# Altium PCB msp430_EMC_v1.0_fucu.PcbDoc (part 1 of 2)
Units mil, origin at the board's own origin, x right, y up, seen from the top; angles counter-clockwise.
Board outline 6328.11 x 4921.26 mil, 2 copper layers (Top Layer, Bottom Layer); 186 components, 146 nets, 623 pads, 75 vias.
Unrouted connection lines stored in the file: 47.
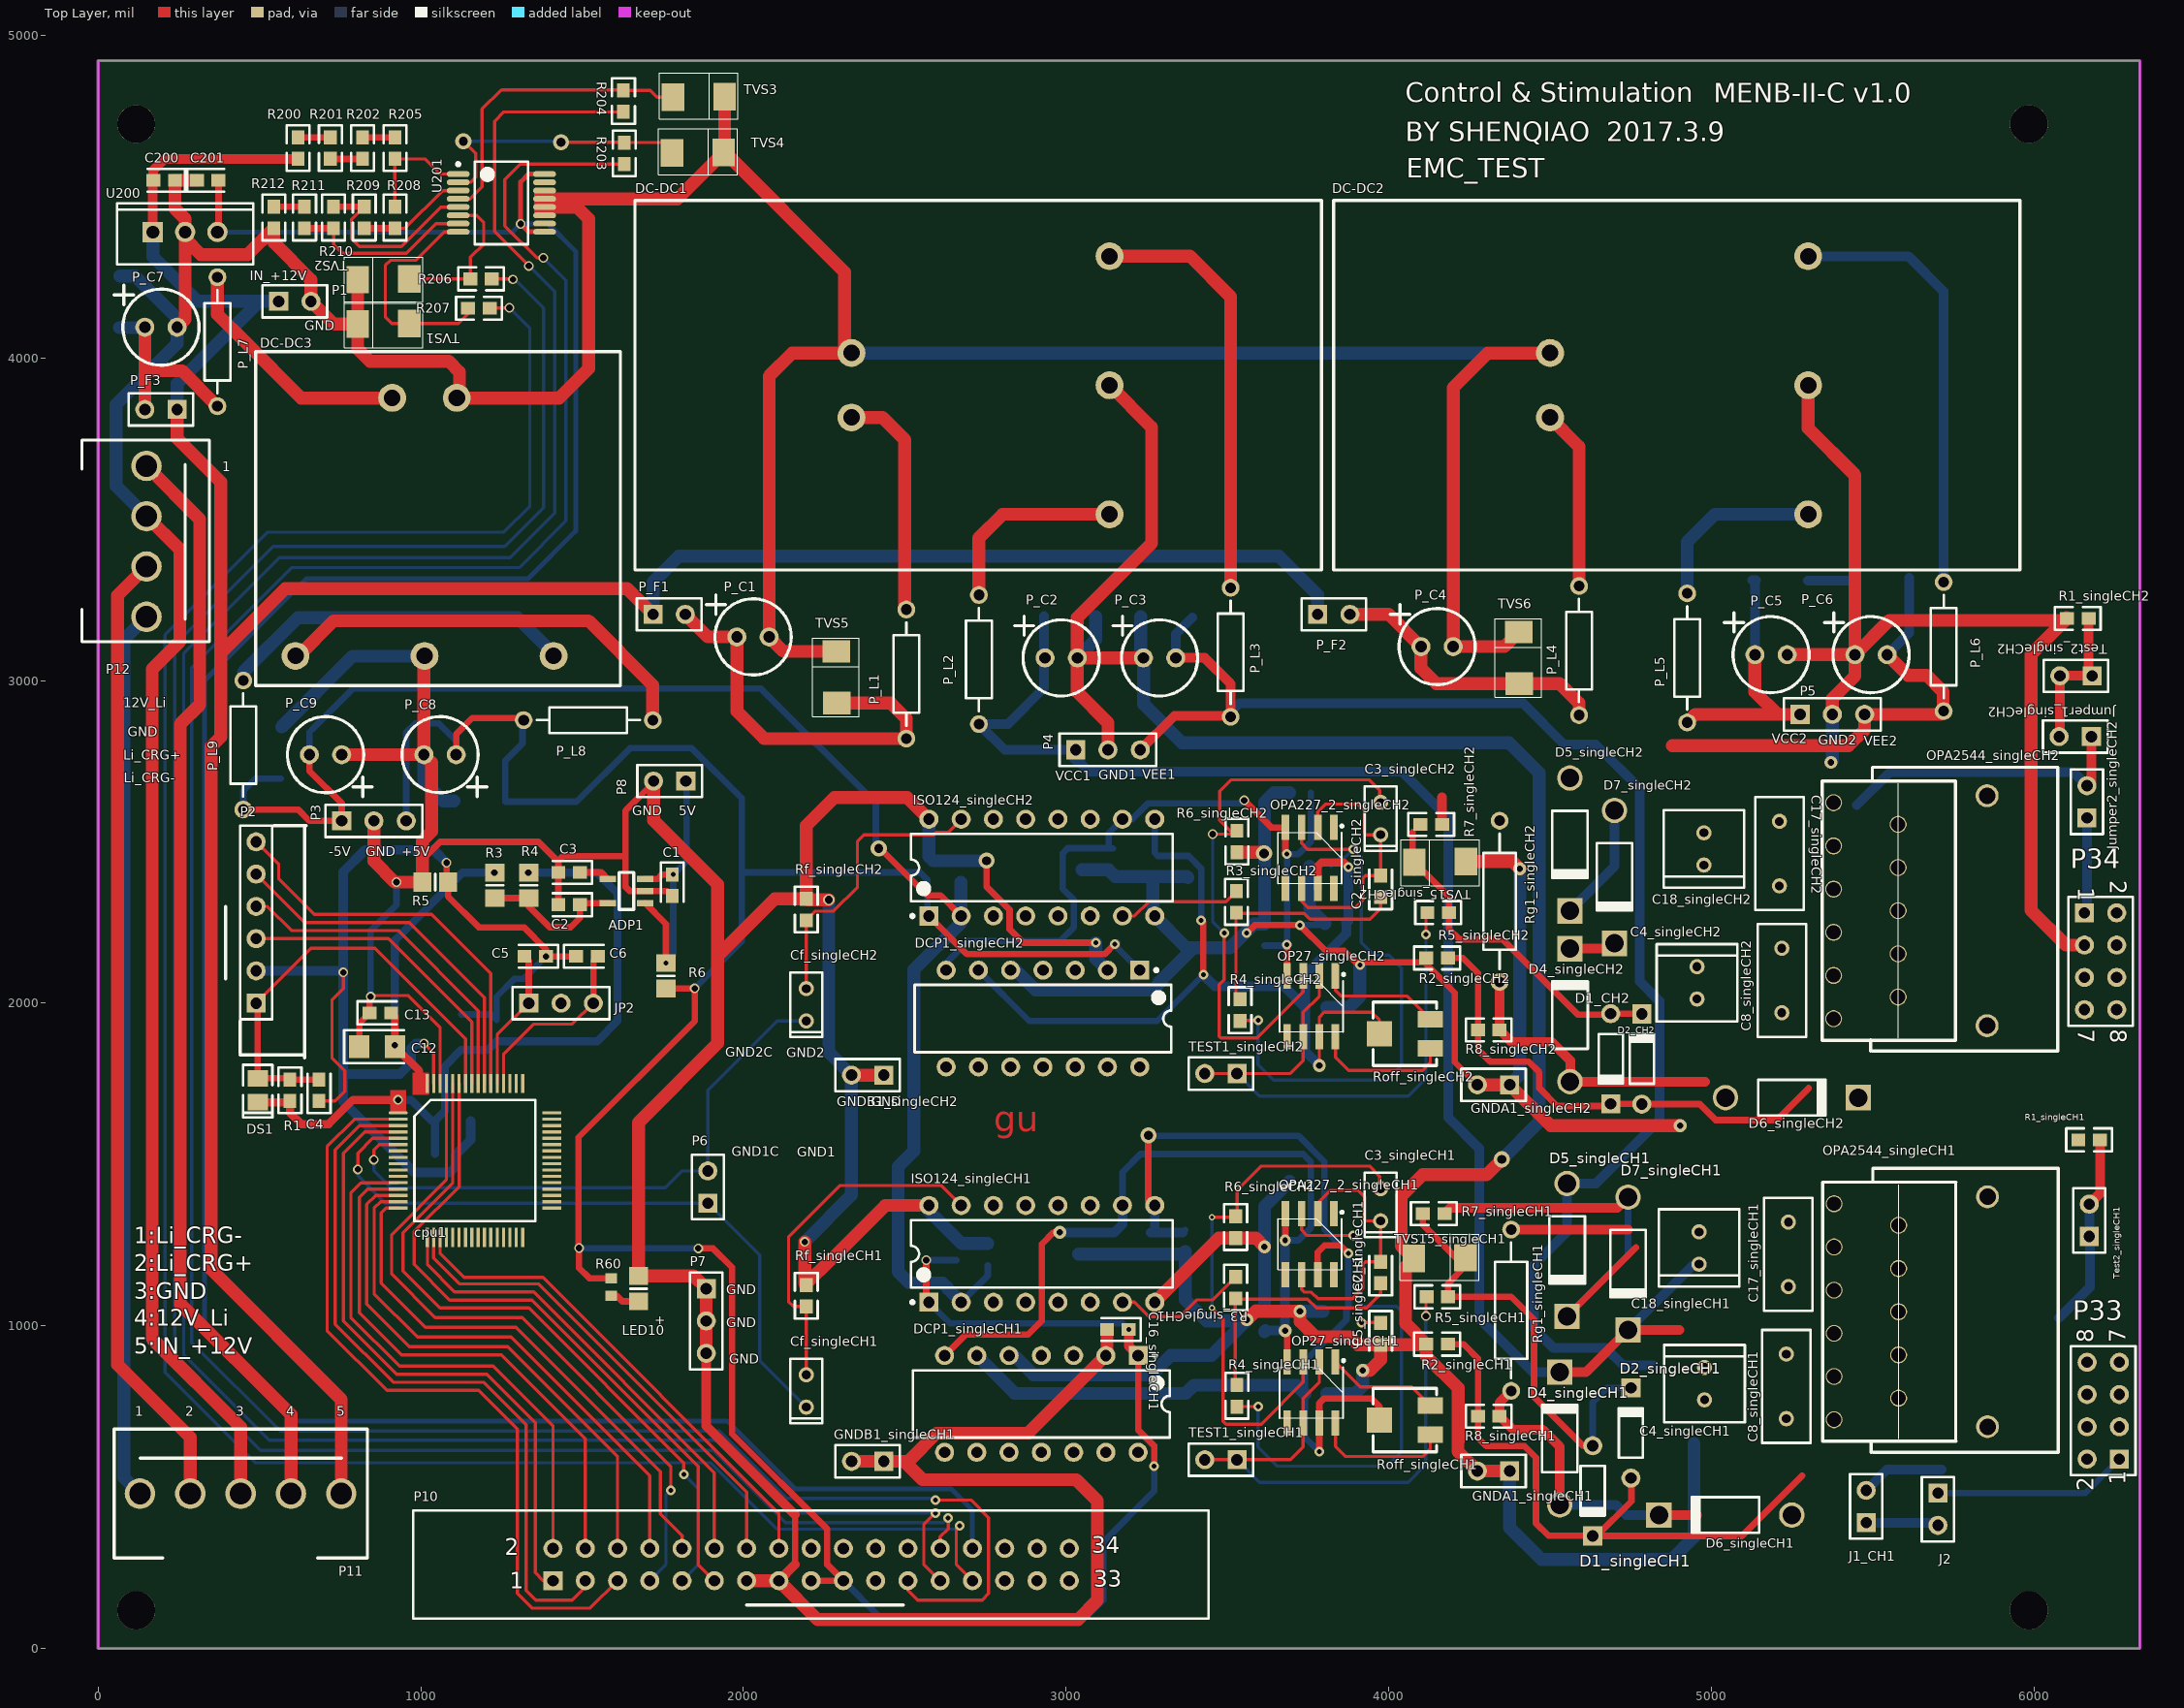
[diagram p0: Top Layer view]
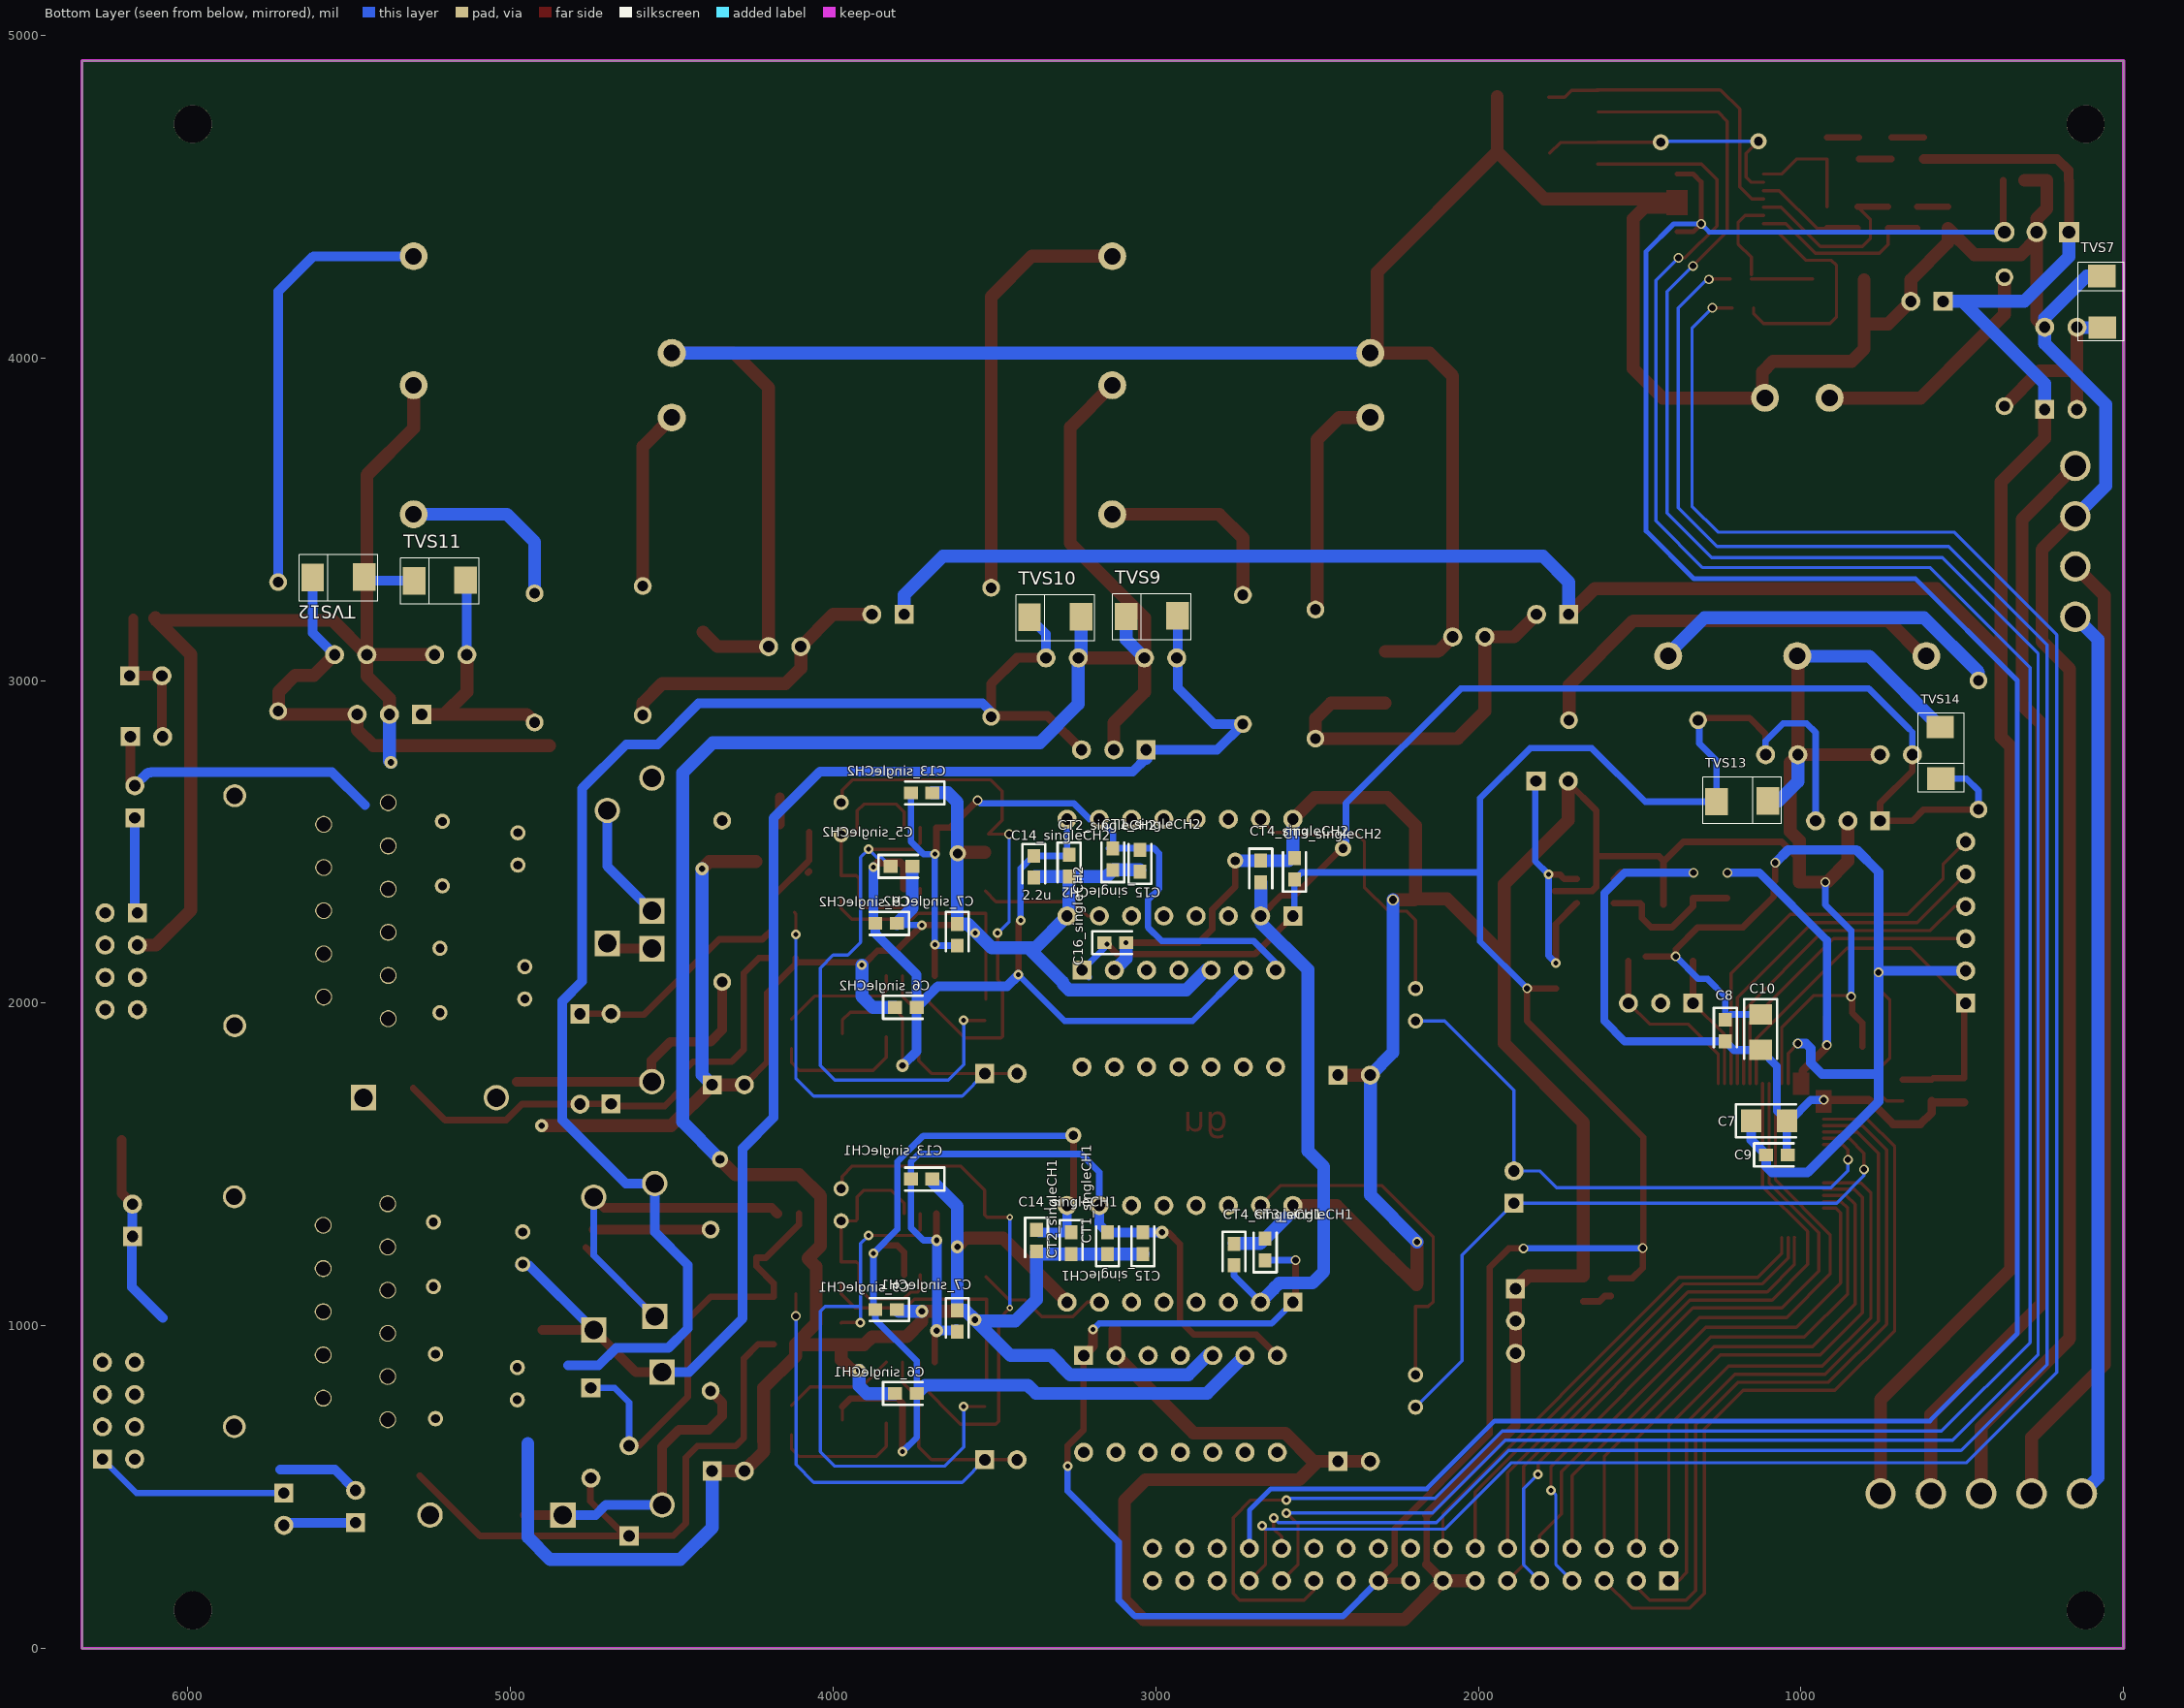
[diagram p1: Bottom Layer view, seen from below]

## Layer stack, top to bottom
Top Layer: signal copper 1.4
Dielectric: dielectric 12.6, FR-4, Dk 4.8
Bottom Layer: signal copper 1.4

## Board outline
0,4921.26 6328.11,4921.26 6328.11,0 0,0 0,4921.26

## Design rules (kind name [scope] priority, off if disabled: settings)
Clearance [All] p1: gap=10
ComponentClearance [All] p1 off: gap=2 collisioncheckmode=3 verticalgap=2 showdistances=FALSE
FabricationTestPointUsage TestPointUsage [All] p1: valid=0 allowmultiple=FALSE
FabricationTestpoint Testpoint [All] p1: side=3 testpointundercomponent=TRUE minsize=40 maxsize=100 preferedsize=60 minholesize=0 maxholesize=40 preferedholesize=32 testpointgrid=1 allowsidetop=TRUE allowsidebottom=TRUE usegrid=TRUE gridtolerance=0.01
HoleSize [All] p1: absolutevalues=TRUE maxlimit=500 minlimit=0 maxpercent=80.000 minpercent=20.000
HoleToHoleClearance [All] p1: gap=1 allowstackedmicrovias=TRUE
MinimumSolderMaskSliver [All] p1: minsoldermaskwidth=0
PolygonConnect [All] p1: connectstyle=Relief reliefconductorwidth=10 reliefentries=4 polygonreliefangle="90 Angle"
RoutingVias [All] p1: holewidth=20 width=30 viastyle="Through Hole" minholewidth=8 minwidth=20 maxholewidth=48 maxwidth=50
SilkToSilkClearance [All] p1: silktosilkclearance=0
SilkscreenOverComponentPads [IsPad] p1: minsilkscreentomaskgap=0
SolderMaskExpansion [All] p1: expansion=4
Width Width_VEE [All] p1: maxlimit=100 minlimit=10 preferedwidth=30
Width Width_VCC [InNetClass('VCC[1..2]')] p2: maxlimit=100 minlimit=20 preferedwidth=30
Width Width_GNDA [InNetClass('GNDA[1..2]')] p3: maxlimit=100 minlimit=10 preferedwidth=30
Width Width_ALL [All] p4: maxlimit=100 minlimit=5 preferedwidth=10 minimp=50.000000 maximp=50.000000 favimp=50.000000
20 further rules are at their usual default settings.

## Classes and differential pairs
net class VEE[1..2]: VEE1 VEE2
net class VCC[1..2]: VCC1 VCC2
net class SIG_IN[1..2]: SIG_IN1 SIG_IN2
net class GNDA[1..2]: GNDA1 GNDA2
component class 输出板: P1 P3 P4 P5 P11 P12 P33 P34
component class U_ADC_USB: ADP1 bead C1 C2 C3 C4 C5 C6 C7 C8 C9 C10 C12 C13 cpu1 DS1 JP2 LED10 P2 P6 P7 P8 P10 R1 R3 R4 R5 R6 R60
channel class 单通道刺激输出: singleCH1 singleCH2
net class OUT[1..2]: OUT1 OUT2
component class singleCH1: C2_singleCH1 C3_singleCH1 C4_singleCH1 C5_singleCH1 C6_singleCH1 C7_singleCH1 C8_1 C9_singleCH1 C13_singleCH1 C14_singleCH1 C15_singleCH1 C16_singleCH1 C17_1 C18_singleCH1 Cf_singleCH1 CT1_singleCH1 CT2_singleCH1 CT3_singleCH1 CT4_singleCH1 D1_singleCH1 D2_singleCH1 D4_singleCH1 D5_singleCH1 D6_singleCH1 D7_singleCH1 DCP1_1 GNDA1_1 GNDB GNDB1_1 ISO124_1 Jumper1_1 Jumper2_1 OP27_singleCH1 OPA227_2_1 OPA2544_1 P1_1 P2_1 P3_1 P4_1 P5_1 P6_1 R1_singleCH1 R2_singleCH1 R3_singleCH1 R4_singleCH1 R5_singleCH1 R6_singleCH1 R7_singleCH1 R8_singleCH1 Rf_singleCH1 Rg1_1 Roff_1 TEST1_1 Test2_1 TVS15_1
component class singleCH2: C2_singleCH2 C3_singleCH2 C4_singleCH2 C5_singleCH2 C6_singleCH2 C7_singleCH2 C8_2 C9_singleCH2 C13_singleCH2 C14_singleCH2 C15_singleCH2 C16_singleCH2 C17_2 C18_singleCH2 Cf_singleCH2 CT1_singleCH2 CT2_singleCH2 CT3_singleCH2 CT4_singleCH2 D1_CH2 D2_CH2 D4_singleCH2 D5_singleCH2 D6_singleCH2 D7_singleCH2 DCP1_2 GNDA1_2 GNDB1_2 ISO124_2 Jumper1_2 Jumper2_2 OP27_singleCH2 OPA227_2_2 OPA2544_2 P2_2 P3_2 P4_2 P5_2 P6_2 R1_singleCH2 R2_singleCH2 R3_singleCH2 R4_singleCH2 R5_singleCH2 R6_singleCH2 R7_singleCH2 R8_singleCH2 Rf_singleCH2 Rg1_2 Roff_2 TEST1_2 Test2_2 TVS15_2 U1_2 U2_2 U3_2 U4_2
component class U_电源3: 12-34V 33uH DC-DC1 DC-DC2 DC-DC3 FUSE P_C1 P_C2 P_C3 P_C4 P_C5 P_C6 P_C7 P_C8 P_C9 P_F1 P_F2 P_F3 P_L1 P_L2 P_L3 P_L4 P_L5 P_L6 P_L7 P_L8 P_L9 TVS5 TVS6 TVS7 TVS9 TVS10 TVS11 TVS12 TVS13 TVS14
component class U_Li_Monitor: C200 C201 R200 R201 R202 R203 R204 R205 R206 R207 R208 R209 R210 R211 R212 TVS1 TVS2 TVS3 TVS4 U200 U201

## Components (designator, comment, footprint, x,y, rotation, side; value= is the part's Value field where it differs from the comment)
ADP1 "LDO 3.3V" ADP1711_3v3 -28325,32510.2 r90 top
C1 "1u" CC1608-0603 1780,2365.2 r270 top
C2 "1u" CC1608-0603 1460,2305.2 r180 top
C2_singleCH1 "1000p" cap0603 3975,1165 r90 top (schematic designator C2)
C2_singleCH2 "1000p" cap0603 3975,2361.93 r90 top (schematic designator C2)
C3 "10n" CC1608-0603 1460,2405.2 r180 top
C3_singleCH1 "2.2u" TAN_CAP-A 3975,1375 r90 top (schematic designator C3)
C3_singleCH2 "2.2u" TAN_CAP-A 3975,2571.93 r90 top (schematic designator C3)
C4 "0.1uF" CC1608-0603 685,1730 r90 top
C4_singleCH1 "10u" TAN_CAP-B 4978.78,820.6 r270 top (schematic designator C4)
C4_singleCH2 "10u" TAN_CAP-B 4955.45,2062.89 r270 top (schematic designator C4)
C5 "15p" CC1608-0603 1355,2145 r180 top
C5_singleCH1 "220p" cap0603 3975,975 r270 top (schematic designator C5)
C5_singleCH2 "220p" cap0603 3788.18,2423.97 r180 bottom (schematic designator C5)
C6 "15p" CC1608-0603 1515,2145 r0 top
C6_singleCH1 "0.1u" cap0603 3774.31,790 r180 bottom (schematic designator C6)
C6_singleCH2 "0.1u" cap0603 3774.31,1986.93 r180 bottom (schematic designator C6)
C7 "10uF" CC3216-1206 1099.29,1635 r180 bottom
C7_singleCH1 "0.1u" cap0603 3615,1015 r270 bottom (schematic designator C7)
C7_singleCH2 "0.1u" cap0603 3615,2211.93 r270 bottom (schematic designator C7)
C8 "Cap Semi" CC1608-0603 1235,1915 r270 bottom
C8_singleCH1 "0.1u" RAD-0.2 5232.22,812.31 r270 top (schematic designator C8)
C8_singleCH2 "0.1u" RAD-0.2 5218.37,2070.21 r270 top (schematic designator C8)
C9 "0.1uF" CC1608-0603 1075,1530 r180 bottom
C9_singleCH1 "0.1u" cap0603 3835.68,1050 r0 bottom (schematic designator C9)
C9_singleCH2 "0.1u" cap0603 3835.68,2246.93 r0 bottom (schematic designator C9)
C10 "10uF" CC3216-1206 1125,1910 r270 bottom
C12 "10uF" CC3216-1206 865,1865 r0 top
C13 "0.1uF" CC1608-0603 875,1970 r0 top
C13_singleCH1 "0.1u" cap0603 3725.68,1455 r0 bottom (schematic designator C13)
C13_singleCH2 "0.1u" cap0603 3725.68,2651.93 r0 bottom (schematic designator C13)
C14_singleCH1 "2.2u" cap0603 3369.62,1263.87 r270 bottom (schematic designator C14)
C14_singleCH2 "2.2u" cap0603 3377.65,2422.73 r270 bottom (schematic designator C14)
C15_singleCH1 "2.2u" cap0603 3039.51,1256.01 r90 bottom (schematic designator C15)
C15_singleCH2 "2.2u" cap0603 3049.36,2441.22 r90 bottom (schematic designator C15)
C16_singleCH1 "2.2u" cap0603 3160.49,988.86 r180 top (schematic designator C16)
C16_singleCH2 "2.2u" cap0603 3125.53,2187.3 r180 bottom (schematic designator C16)
C17_singleCH1 "0.1u" RAD-0.2 5238.72,1221.35 r270 top (schematic designator C17)
C17_singleCH2 "0.1u" RAD-0.2 5210.93,2463.33 r270 top (schematic designator C17)
C18_singleCH1 "10u" TAN_CAP-B 4961.7,1241.05 r90 top (schematic designator C18)
C18_singleCH2 "10u" TAN_CAP-B 4976.91,2477.93 r90 top (schematic designator C18)
C200 "0.33uF" cap0603 205,4550 r180 top
C201 "0.1uF" cap0603 340,4550 r0 top
Cf_singleCH1 "2.2u" TAN_CAP-A 2195,798.07 r90 top (schematic designator Cf)
Cf_singleCH2 "2.2u" TAN_CAP-A 2195,1995 r90 top (schematic designator Cf)
cpu1 "MSP430F169" msp430f149 930,1660 r0 top
CT1_singleCH1 "1u" cap0603 3149.54,1256.01 r90 bottom (schematic designator CT1)
CT1_singleCH2 "1u" cap0603 3132.76,2446.03 r90 bottom (schematic designator CT1)
CT2_singleCH1 "1u" cap0603 3262.2,1256.01 r270 bottom (schematic designator CT2)
CT2_singleCH2 "1u" cap0603 3268.74,2426.13 r270 bottom (schematic designator CT2)
CT3_singleCH1 "1u" cap0603 2660.87,1236.76 r90 bottom (schematic designator CT3)
CT3_singleCH2 "1u" cap0603 2570.24,2416.3 r90 bottom (schematic designator CT3)
CT4_singleCH1 "1u" cap0603 2757.3,1220.84 r270 bottom (schematic designator CT4)
CT4_singleCH2 "1u" cap0603 2674.42,2408.01 r270 bottom (schematic designator CT4)
D1_CH2 "" DO-35 4688.19,1827.57 r270 top (schematic designator D1)
D1_singleCH1 "" DO-35 4632.2,488.5 r270 top (schematic designator D1)
D2_CH2 "" DO-35 4784.37,1826.84 r90 top (schematic designator D2)
D2_singleCH1 "" DO-35 4750.72,667.83 r90 top (schematic designator D2)
D4_singleCH1 "" DO-41 4529.83,650.87 r90 top (schematic designator D4)
D4_singleCH2 "" DO-41 4561.99,1962.84 r90 top (schematic designator D4)
D5_singleCH1 "" DO-41 4552.98,1235.15 r270 top (schematic designator D5)
D5_singleCH2 "" DO-41 4561.65,2491.73 r270 top (schematic designator D5)
D6_singleCH1 "" DO-41 5043.3,413.64 r180 top (schematic designator D6)
D6_singleCH2 "" DO-41 5249.66,1707.29 r0 top (schematic designator D6)
D7_singleCH1 "" DO-41 4742.07,1192.91 r270 top (schematic designator D7)
D7_singleCH2 "" DO-41 4699.96,2391.19 r270 top (schematic designator D7)
DC-DC1 "12-34" 12-35 2335,4015 r0 top
DC-DC2 "12-34" 12-35 4500,4015 r0 top
DC-DC3 "12-5" 12-5 1111.85,3875.93 r270 top
DCP1_singleCH1 "DCP010505DB" DIP-14 2923.53,757.88 r270 top (schematic designator DCP1)
DCP1_singleCH2 "DCP010505DB" DIP-14 2928.48,1952.22 r270 top (schematic designator DCP1)
DS1 "IN4148" "SMD _LED" 495,1730 r90 top
GNDA1_singleCH1 "Header 2" HDR1X2 4375,550 r180 top (schematic designator GNDA1)
GNDA1_singleCH2 "Header 2" HDR1X2 4375,1746.93 r180 top (schematic designator GNDA1)
GNDB1_singleCH1 "Header 2" HDR1X2 2435,580 r180 top (schematic designator GNDB1)
GNDB1_singleCH2 "Header 2" HDR1X2 2435,1776.93 r180 top (schematic designator GNDB1)
ISO124_singleCH1 "ISO124" DIP-16 2925,1223.07 r90 top (schematic designator ISO124)
ISO124_singleCH2 "ISO124" DIP-16 2925,2420 r90 top (schematic designator ISO124)
J1_CH1 "Header 2" HDR1X2 5479.87,389.92 r90 top (schematic designator Jumper1)
J2 "Header 2" HDR1X2 5702.19,481.75 r270 top (schematic designator Jumper2)
JP2 "8M" HDR1X3 1335,2000 r0 top
Jumper1_singleCH2 "Header 2" HDR1X2 6177.71,2826.18 r180 top (schematic designator Jumper1)
Jumper2_singleCH2 "Header 2" HDR1X2 6164.14,2573.89 r90 top (schematic designator Jumper2)
LED10 "LED" 6-0805_M 1675,1115 r90 top
OP27_singleCH1 "OP27GS" OPA227(D) 3760,803.07 r270 top (schematic designator OP27)
OP27_singleCH2 "OP27GS" OPA227(D) 3760,2000 r270 top (schematic designator OP27)
OPA227_2_singleCH1 "OPA227" OPA227(D) 3755,1263.07 r270 top (schematic designator OPA227_2)
OPA227_2_singleCH2 "OPA227" OPA227(D) 3755,2460 r270 top (schematic designator OPA227_2)
OPA2544_singleCH1 "OPA2544" OPA2544-SANRE 5580.36,1043.22 r270 top (schematic designator OPA2544)
OPA2544_singleCH2 "OPA2544" OPA2544-SANRE 5578.98,2286.14 r270 top (schematic designator OPA2544)
P1 "Header 2" HDR1X2 560,4175 r0 top (schematic designator DC12V_IN)
P2 "Header 6" HDR1X6 490,2000 r90 top
P3 "Header 3" HDR1X3 755,2565 r0 top (schematic designator V_1)
P4 "Header 3" HDR1X3 3030,2785 r0 top (schematic designator POWER1)
P5 "Header 3" HDR1X3 5275,2895 r0 top (schematic designator POWER2)
P6 "Header 2" HDR1X2 1890,1380 r90 top (schematic designator P3)
P7 "Header 3" HDR1X3 1885,1115 r270 top (schematic designator JP6)
P8 "Header 2" HDR1X2 1821.57,2688.26 r180 top
P10 "Header 17X2" HDR2X17-NIUJIAO 1410,210 r0 top (schematic designator P?)
P11 "Header 5" POWER-5P 130,480 r0 top (schematic designator P5)
P12 "Header 4" POWER-4P 150,3665 r270 top (schematic designator P4)
P33 "Header 4X2" HDR2X4 6264.43,586.95 r90 top
P34 "Header 4X2" HDR2X4 6156.29,2279.86 r270 top
P_C1 "Cap Pol3" cap_2.54 2030,3135 r0 top
P_C2 "Cap Pol3" cap_2.54 2985,3070 r0 top
P_C3 "Cap Pol3" cap_2.54 3290,3070 r0 top
P_C4 "Cap Pol3" cap_2.54 4150,3105 r0 top
P_C5 "Cap Pol3" cap_2.54 5185,3080 r0 top
P_C6 "Cap Pol3" cap_2.54 5495,3080 r0 top
P_C7 "Cap Pol3" cap_2.54 195,4095 r0 top
P_C8 "Cap Pol3" cap_2.54 1060,2770 r180 top
P_C9 "Cap Pol3" cap_2.54 705,2770 r180 top
P_F1 "Fuse 1" HDR1X2 1720,3205 r0 top
P_F2 "Fuse 1" HDR1X2 3780,3205 r0 top
P_F3 "Fuse 1" HDR1X2 245,3840 r180 top
P_L1 "Inductor" AXIAL-0.4 2505,3020 r90 top
P_L2 "Inductor" AXIAL-0.4 2730,3065 r270 top
P_L3 "Inductor" AXIAL-0.4 3509.99,3087.39 r270 top
P_L4 "Inductor" AXIAL-0.4 4589.9,3092.62 r90 top
P_L5 "Inductor" AXIAL-0.4 4925,3070 r270 top
P_L6 "Inductor" AXIAL-0.4 5720,3105 r270 top
P_L7 "Inductor" AXIAL-0.4 370,4050 r90 top
P_L8 "Inductor" AXIAL-0.4 1519.21,2877.09 r180 top
P_L9 "Inductor" AXIAL-0.4 450,2800 r270 top
R1 "100K" C1608-0603 595,1730 r270 top
R1_singleCH1 "100" RES0603 6170.79,1576.54 r180 top (schematic designator R1)
R1_singleCH2 "100" RES0603 6135.68,3192.58 r180 top (schematic designator R1)
R2_singleCH1 "10k" RES0603 4150,943.07 r0 top (schematic designator R2)
R2_singleCH2 "10k" RES0603 4150,2140 r0 top (schematic designator R2)
R3 "1" 6-0805_M 1230,2365 r270 top
R3_singleCH1 "4.75k" RES0603 3525.79,1118.28 r270 top (schematic designator R3)
R3_singleCH2 "4.75k" RES0603 3528.02,2313.97 r270 top (schematic designator R3)
R4 "1" 6-0805_M 1335,2365 r270 top
R4_singleCH1 "9.76k" RES0603 3530,783.07 r270 top (schematic designator R4)
R4_singleCH2 "9.76k" RES0603 3539.42,1978.3 r270 top (schematic designator R4)
R5 "Bead" 6-0805_M 1045,2375 r180 top
R5_singleCH1 "10k" RES0603 4150.85,1089.95 r0 top (schematic designator R5)
R5_singleCH2 "10k" RES0603 4153.39,2280.99 r0 top (schematic designator R5)
R6 "Bead" 6-0805_M 1760,2085 r270 top
R6_singleCH1 "470k" RES0603 3525.81,1305.85 r90 top (schematic designator R6)
R6_singleCH2 "470k" RES0603 3529.43,2500.98 r90 top (schematic designator R6)
R7_singleCH1 "10k" RES0603 4139.65,1348.02 r0 top (schematic designator R7)
R7_singleCH2 "10k" RES0603 4131.83,2553.84 r0 top (schematic designator R7)
R8_singleCH1 "10k" RES0603 4310,720 r180 top (schematic designator R8)
R8_singleCH2 "10k" RES0603 4310,1916.93 r180 top (schematic designator R8)
R60 "2K" 1608[0603] 1590,1120 r90 top
R200 "36k" RES0603 620,4650 r270 top
R201 "10k" RES0603 720,4650 r90 top
R202 "10k" RES0603 820,4650 r270 top
R203 "2k" RES0603 1631.06,4633.79 r270 top
R204 "2k" RES0603 1628.41,4795.64 r270 top
R205 "36k" RES0603 920,4650 r90 top
R206 "2k" RES0603 1187.08,4244.7 r0 top
R207 "2k" RES0603 1180.49,4154.09 r0 top
R208 "1.8k" RES0603 920,4435 r90 top
R209 "1.5k" RES0603 825,4435 r270 top
R210 "750R" RES0603 730,4435 r90 top
R211 "10k" RES0603 640,4435 r270 top
R212 "750R" RES0603 545,4435 r90 top
Rf_singleCH1 "470k" RES0603 2195,1093.07 r270 top (schematic designator Rf)
Rf_singleCH2 "470k" RES0603 2195,2290 r270 top (schematic designator Rf)
Rg1_singleCH1 "33" AXIAL-0.5 4379.51,1048.33 r90 top (schematic designator Rg1)
Rg1_singleCH2 "33" AXIAL-0.5 4343.84,2315.41 r90 top (schematic designator Rg1)
Roff_singleCH1 "RPot" POT4MM-2 4050,708.07 r180 top (schematic designator Roff)
Roff_singleCH2 "RPot" POT4MM-2 4050,1905 r180 top (schematic designator Roff)
TEST1_singleCH1 "Header 2" HDR1X2 3530,585 r180 top (schematic designator TEST1)
TEST1_singleCH2 "Header 2" HDR1X2 3530,1781.93 r180 top (schematic designator TEST1)
Test2_singleCH1 "Header 2" HDR1X2 6171.22,1276.96 r90 top (schematic designator Test2)
Test2_singleCH2 "Header 2" HDR1X2 6179.9,3014.4 r180 top (schematic designator Test2)
TVS1 "SMBJ51A" TVS 964.96,4106.43 r180 top
TVS2 "SMBJ51A" TVS 964.96,4244.16 r180 top
TVS3 "SMBJ51A" TVS 1781.79,4807.77 r0 top
TVS4 "SMBJ51A" TVS 1778.99,4634.78 r0 top
TVS5 "SMBJ51A" TVS 2290,2930 r90 top
TVS6 "SMBJ51A" TVS 4405,2990 r90 top
TVS7 "SMBJ51A" TVS 66.2,4093.63 r90 bottom
TVS9 "SMBJ51A" TVS 2932.1,3200.51 r0 bottom
TVS10 "SMBJ51A" TVS 3231.38,3197.69 r0 bottom
TVS11 "SMBJ51A" TVS 5138.88,3311.14 r0 bottom
TVS12 "SMBJ51A" TVS 5452.93,3321.18 r0 bottom
TVS13 "SMBJ51A" TVS 1262.54,2624.66 r180 bottom
TVS14 "SMBJ51A" TVS 568.88,2855.87 r270 bottom
TVS15_singleCH1 "SMBJ51A" TVS 4077.83,1208.92 r0 top (schematic designator TVS15)
TVS15_singleCH2 "SMBJ51A" TVS 4239.4,2439 r180 top (schematic designator TVS15)
U200 "L7805" TO-220-AB 270,4390 r0 top
U201 "CN1185" SSOP16_L 1250,4480 r0 top

## Footprints (in the part's own frame and the unit in brackets; to place one, negate y for a bottom-side part, rotate by r counter-clockwise, add the part's x,y. Pads: shape width x height; smd on the part's side, far side on the other; paste and mask are expansions set on the pad)
6-0805_M [mm] "Chip Resis"
  rect 1.4x1.5 smd: 1(-1,0) 2(1,0)
  silkscreen extent 0,-0.65 0,0.65, body extent -1.07,-0.7 1.07,0.7, height 0.7
12-5 [mm]
  round 2.2 hole 1.3: 1(0,-5.08) 2(0,0) 3(20.32,7.62) 4(20.32,-2.54) 5(20.32,-12.7)
  silkscreen extent -3.63,-15.82 22.66,12.88
12-35 [mm]
  round 2.2 hole 1.3: 1(0,0) 2(0,-5.08) 3(20.32,7.62) 4(20.32,-2.54) 5(20.32,-12.7)
  silkscreen extent -17.04,-17.08 37,12
1608[0603] [mm] "Chip Capacitor, Body 1.6x0.8mm, IPC High Density"
  rect 0.8x0.9 smd: 1(-0.7,0) 2(0.7,0)
  body extent -0.87,-0.48 0.87,0.48, height 1.3
ADP1711_3v3 [mm]
  rect 0.5x1.3 smd: 1(-767.08,-762.508) 2(-766.13,-762.508) 3(-765.18,-762.508) 4(-765.18,-759.587) 5(-767.08,-759.587)
  silkscreen extent -767.59,-761.62 -764.67,-760.48
AXIAL-0.4 [mm]
  round 1.4 hole 0.85: 1(-5.08,0) 2(5.08,0)
  silkscreen extent -4.06,-1.02 4.06,1.02
AXIAL-0.5 [mm]
  round 1.4 hole 0.85: 1(-6.35,0) 2(6.35,0)
  silkscreen extent -5.33,-1.27 5.33,1.27
C1608-0603 [mm]
  rect 1.1x1 smd: 1(-0.85,0) 2(0.85,0)
  silkscreen extent -1.8,-0.9 1.8,0.9
cap0603 [mm]
  rect 1.1x1 smd: 1(-0.85,0) 2(0.85,0)
  silkscreen extent -1.8,-0.9 1.3,0.9
cap_2.54 [mm]
  round 1.5 hole 0.9: 1(-1.27,0) 2(1.27,0)
  silkscreen extent -3.68,-3 3,3.3
CC1608-0603 [mm]
  rect 1.1x1 smd: 1(-0.85,0) 2(0.85,0)
  silkscreen extent -1.8,-0.9 1.3,0.9
CC3216-1206 [mm]
  rect 1.6x1.8 smd: 1(-1.4,0) 2(1.4,0)
  silkscreen extent -2.6,-1.3 2.1,1.3
DIP-14 [mm]
  rect 1.5x1.5 hole 0.9: 1(-3.81,7.62)
  round 1.5 hole 0.9: 2(-3.81,5.08) 3(-3.81,2.54) 4(-3.81,0) 5(-3.81,-2.54) 6(-3.81,-5.08) 7(-3.81,-7.62) 8(3.81,-7.62) 9(3.81,-5.08) 10(3.81,-2.54) 11(3.81,0) 12(3.81,2.54) 13(3.81,5.08) 14(3.81,7.62)
  silkscreen extent -3.93,-10.1 2.65,10.1, body extent -3.6,-10.1 3.6,10.1, height 5.08
DIP-16 [mm]
  rect 1.5x1.5 hole 0.9: 1(-3.81,8.89)
  round 1.5 hole 0.9: 2(-3.81,6.35) 3(-3.81,3.81) 4(-3.81,1.27) 5(-3.81,-1.27) 6(-3.81,-3.81) 7(-3.81,-6.35) 8(-3.81,-8.89) 9(3.81,-8.89) 10(3.81,-6.35) 11(3.81,-3.81) 12(3.81,-1.27) 13(3.81,1.27) 14(3.81,3.81) 15(3.81,6.35) 16(3.81,8.89)
  silkscreen extent -3.93,-10.3 2.65,10.31, body extent -3.6,-10.28 3.6,10.28, height 5.08
DO-35 [mm] "Diode, Axial; Body 3.8 x 1.9 mm (Lx"
  round 1.5 hole 0.9: 1(-3.55,0)
  rect 1.5x1.5 hole 0.9: 2(3.55,0)
  silkscreen extent -1.95,-0.95 2.05,0.95
DO-41 [mm] "Diode, Axial; Body 5.2 x 2.7 mm (Lx"
  round 2 hole 1.45: 1(-5.23,0)
  rect 2x2 hole 1.45: 2(5.23,0)
  silkscreen extent -2.65,-1.4 2.75,1.4
HDR1X2 [mm]
  rect 1.5x1.5 hole 0.9: 1(0,0)
  round 1.5 hole 0.9: 2(2.54,0)
  silkscreen extent -1.27,-1.27 3.81,1.27
HDR1X3 [mm] "Connector; Header; 3 Position"
  rect 1.5x1.5 hole 0.9: 1(0,0)
  round 1.5 hole 0.9: 2(2.54,0) 3(5.08,0)
  silkscreen extent -1.27,-1.27 6.35,1.27
HDR1X6 [mm] "Connector; Header; 6 Position"
  rect 1.5x1.5 hole 0.9: 1(0,0)
  round 1.5 hole 0.9: 2(2.54,0) 3(5.08,0) 4(7.62,0) 5(10.16,0) 6(12.7,0)
  silkscreen extent -1.27,-1.27 13.97,1.27
HDR2X4 [mm] "Connector; Hea"
  rect 1.5x1.5 hole 0.9: 1(0,0)
  round 1.5 hole 0.9: 2(0,2.54) 3(2.54,0) 4(2.54,2.54) 5(5.08,0) 6(5.08,2.54) 7(7.62,0) 8(7.62,2.54)
  silkscreen extent -1.27,-1.27 8.89,3.81
HDR2X17-NIUJIAO [mm]
  rect 1.5x1.5 hole 0.9: 1(0,0)
  round 1.5 hole 0.9: 2(0,2.54) 3(2.54,0) 4(2.54,2.54) 5(5.08,0) 6(5.08,2.54) 7(7.62,0) 8(7.62,2.54) 9(10.16,0) 10(10.16,2.54) 11(12.7,0) 12(12.7,2.54) 13(15.24,0) 14(15.24,2.54) 15(17.78,0) 16(17.78,2.54) 17(20.32,0) 18(20.32,2.54) 19(22.86,0) 20(22.86,2.54) 21(25.4,0) 22(25.4,2.54) 23(27.94,0) 24(27.94,2.54) 25(30.48,0) 26(30.48,2.54) 27(33.02,0) 28(33.02,2.54) 29(35.56,0) 30(35.56,2.54) 31(38.1,0) 32(38.1,2.54) 33(40.64,0) 34(40.64,2.54)
  silkscreen extent -11,-2.98 51.6,5.52
msp430f149 [mm]
  oval 1.5x0.25 smd: 1(0,0)
  rect 1.5x0.25 smd: 2(0,-0.5) 3(0,-1) 4(0,-1.5) 5(0,-2) 6(0,-2.5) 7(0,-3) 8(0,-3.5) 9(0,-4) 10(0,-4.5) 11(0,-5) 12(0,-5.5) 13(0,-6) 14(0,-6.5) 15(0,-7) 16(0,-7.5) 33(12.1,-7.5) 34(12.1,-7) 35(12.1,-6.5) 36(12.1,-6) 37(12.1,-5.5) 38(12.1,-5) 39(12.1,-4.5) 40(12.1,-4) 41(12.1,-3.5) 42(12.1,-3) 43(12.1,-2.5) 44(12.1,-2) 45(12.1,-1.5) 46(12.1,-1) 47(12.1,-0.5) 48(12.1,0)
  rect 0.25x1.5 smd: 17(2.3,-9.8) 18(2.8,-9.8) 19(3.3,-9.8) 20(3.8,-9.8) 21(4.3,-9.8) 22(4.8,-9.8) 23(5.3,-9.8) 24(5.8,-9.8) 25(6.3,-9.8) 26(6.8,-9.8) 27(7.3,-9.8) 28(7.8,-9.8) 29(8.3,-9.8) 30(8.8,-9.8) 31(9.3,-9.8) 32(9.8,-9.8) 49(9.8,2.3) 50(9.3,2.3) 51(8.8,2.3) 52(8.3,2.3) 53(7.8,2.3) 54(7.3,2.3) 55(6.8,2.3) 56(6.3,2.3) 57(5.8,2.3) 58(5.3,2.3) 59(4.8,2.3) 60(4.3,2.3) 61(3.8,2.3) 62(3.3,2.3) 63(2.8,2.3) 64(2.3,2.3)
  silkscreen extent 1.28,-8.51 10.81,1.02
OPA227(D) [mm]
  rect 2x0.6 smd paste-0.025 mask+0: 1(-2.146,1.905) 2(-2.146,0.635) 3(-2.146,-0.635) 4(-2.146,-1.905) 5(2.654,-1.905) 6(2.654,-0.635) 7(2.654,0.635) 8(2.654,1.905)
  silkscreen extent -2.36,-2.5 2.25,2.64
OPA2544-SANRE [mil]
  round 52.4 hole 44.5: 1(-335,-200) 2(-268.1,0) 3(-201.1,-200) 4(-134.2,0) 5(-67.3,-200) 6(-0.4,0) 7(66.6,-200) 8(133.5,0) 9(200.4,-200) 10(267.4,0) 11(334.3,-200)
  round 70.87 hole 51.18: ""(-356.69,275.59) ""(355.91,275.59)
  silkscreen extent -445,-235 435,495
POT4MM-2 [mm]
  rect 2x1.3 smd: CCW(-2,-1.15) CW(-2,1.15)
  rect 2x2 smd: W(2,0)
  silkscreen extent -2.5,-2.5 2.5,2.5
POWER-4P [mm]
  round 2.4 hole 1.7: 1(0,0) 2(3.96,0) 3(7.92,0) 4(11.88,0)
  silkscreen extent -2.03,-5.08 13.84,4.95
POWER-5P [mm]
  round 2.4 hole 1.7: 1(0,0) 2(3.96,0) 3(7.92,0) 4(11.88,0) 5(15.84,0)
  silkscreen extent -2.03,-5.08 17.91,5.08
RAD-0.2 [mm]
  round 1.2 hole 0.7: 1(-2.54,0) 2(2.54,0)
  silkscreen extent -4.44,-1.91 4.44,1.91
RES0603 [mm]
  rect 1.1x1 smd: 1(-0.85,0) 2(0.85,0)
  silkscreen extent -1.8,-0.9 1.8,0.9
"SMD _LED" [mm]
  rect 1.3x1.6 smd: 1(0.95,0) 2(-0.95,0)
  silkscreen extent -2.13,-1.15 2,1.15
SSOP16_L [mm]
  oval 1.8x0.45 smd: 1(-3.4,2.275) 2(-3.4,1.625) 3(-3.4,0.975) 4(-3.4,0.325) 5(-3.4,-0.325) 6(-3.4,-0.975) 7(-3.4,-1.625) 8(-3.4,-2.275) 9(3.4,-2.275) 10(3.4,-1.625) 11(3.4,-0.975) 12(3.4,-0.325) 13(3.4,0.325) 14(3.4,0.975) 15(3.4,1.625) 16(3.4,2.275)
  silkscreen extent -3.52,-3.25 2.1,3.25, body extent -2.7,-3.25 2.7,3.25, height 2
TAN_CAP-A [mm]
  round 1.2 hole 0.7: 1(-1.27,0) 2(1.27,0)
  silkscreen extent -2.54,-1.27 2.54,1.27
TAN_CAP-B [mm]
  round 1.2 hole 0.7: 1(-1.27,0) 2(1.27,0)
  silkscreen extent -3.05,-3.18 3.05,3.18
TO-220-AB [mm]
  rect 1.6x1.6 hole 1: 1(-2.54,0)
  round 1.6 hole 1: 2(0,0) 3(2.54,0)
  silkscreen extent -5.35,-2.55 5.35,2.25
TVS [mm]
  rect 1.78x2.16 smd: 1(0,0) 2(4.064,0.051)
  silkscreen extent -1.07,-1.73 5.13,1.91

## Part data
ADP1: library part ADP1711_3v3
C1 C2 C3 C4 C5 C6 C7 C9 C10 C12 C13: library part "Cap Semi", "Capacitor (Semiconductor SIM Model)"
C2_singleCH1 C2_singleCH2 C5_singleCH1 C5_singleCH2 C6_singleCH1 C6_singleCH2 C7_singleCH1 C7_singleCH2 C9_singleCH1 C9_singleCH2 C13_singleCH1 C13_singleCH2 C14_singleCH1 C14_singleCH2 C15_singleCH1 C15_singleCH2 C16_singleCH1 C16_singleCH2 C200 C201 CT1_singleCH1 CT1_singleCH2 CT2_singleCH1 CT2_singleCH2 CT3_singleCH1 CT3_singleCH2 CT4_singleCH1 CT4_singleCH2: library part Cap, "Capacitor"
C3_singleCH1 C3_singleCH2 C4_singleCH1 C4_singleCH2 C18_singleCH1 C18_singleCH2 Cf_singleCH1 Cf_singleCH2: library part "Cap Pol1", "Polarized Capacitor (Radial)"
C8: "Capacitor (Semiconductor SIM Model)"
cpu1: library part MSP430F149
D1_CH2 D1_singleCH1 D2_CH2 D2_singleCH1: library part "Diode 1N4148", "High Conductance Fast Diode"
D4_singleCH1 D4_singleCH2 D5_singleCH1 D5_singleCH2 D6_singleCH1 D6_singleCH2 D7_singleCH1 D7_singleCH2: library part "Diode 1N4934", "1 Amp Fast Recovery Rectifier"
DS1 LED10: library part LED3, "Typical BLUE SiC LED"
GNDA1_singleCH1 GNDA1_singleCH2 GNDB1_singleCH1 GNDB1_singleCH2 J1_CH1 J2 Jumper1_singleCH2 Jumper2_singleCH2 P3 P4 P5 TEST1_singleCH1 TEST1_singleCH2 Test2_singleCH1 Test2_singleCH2: library part Header
JP2: library part "Header 3", "Header, 3-Pin"
OP27_singleCH1 OP27_singleCH2: "Low-Noise, Precision Operational Amplifier"
P1 P6: "Header, 2-Pin"
P2: "Header, 6-Pin"
P7: "Header, 3-Pin"
P8: "Header,"
P33 P34: "Header, 4-Pin, Dual row"
P_C1 P_C2 P_C3 P_C4 P_C5 P_C6 P_C7 P_C8 P_C9: "Polarized Capacitor (Surface Mount)"
R1 R60: library part Res3, "Resistor"
R1_singleCH1 R1_singleCH2 R2_singleCH1 R2_singleCH2 R3_singleCH1 R3_singleCH2 R4_singleCH1 R4_singleCH2 R5 R5_singleCH1 R5_singleCH2 R6 R6_singleCH1 R6_singleCH2 R7_singleCH1 R7_singleCH2 R8_singleCH1 R8_singleCH2 Rf_singleCH1 Rf_singleCH2: library part Res2, "Resistor"
R3 R4: library part "Res Semi", "Semiconductor Resistor"
R200 R201 R202 R203 R204 R205 R206 R207 R208 R209 R210 R211 R212: library part Res1, "Resistor"
Roff_singleCH1 Roff_singleCH2: library part RP

## Free pads (board coordinates)
  round 118.11 hole 118.11: 0(5984.25,118.11) 1(118.11,118.11) 2(5984.25,4724.41) 3(118.11,4724.41)

## Via types
v1: diameter 30, hole 15, Top Layer to Bottom Layer, 29 vias
v2: diameter 30, hole 20, Top Layer to Bottom Layer, 25 vias
v3: diameter 40, hole 20, Top Layer to Bottom Layer, 10 vias
v4: diameter 50, hole 28, Top Layer to Bottom Layer, 6 vias
v5: diameter 20, hole 10, Top Layer to Bottom Layer, 2 vias
v6: diameter 35, hole 17, Top Layer to Bottom Layer, 1 vias
v7: diameter 35, hole 25, Top Layer to Bottom Layer, 1 vias
v8: diameter 50, hole 30, Top Layer to Bottom Layer, 1 vias

## Nets (pads, with @x,y where several pads share a name; then routed paths per layer and width w, separated by ;. In a path a pad name is that pad's centre, name@x,y a point inside that pad or via, vN(x,y) a via of type N, cw(c..) or ccw(c..) an arc to the next point about the centre after c; other vN are vias at no path point)
5V: ADP1.1 ADP1.3 C1.1 P8.1 R6.1 | length 891.7
  Top Layer w20: ADP1.1@1695,2310.2 1760,2245.2 v1(1760,2124.37) ; ADP1.3@1695,2385 1734.22,2385 1747.88,2398.66 C1.1@1780,2398.66
  Bottom Layer w20: v1(1760,2124.37) 1782.72,2147.09 v1(1782.72,2398.91) 1824.01,2440.21 P8.1@1824.01,2686.12
5V_7805: C201.2 P10.28 U200.3 U201.9 U201.16 | length 8572.8
  Top Layer w15: U201.9@1383.86,4390.43 1334.57,4390.43 v2(1310,4415) 1310,4545 1334.57,4569.57 U201.16@1383.86,4569.57
  Top Layer w20: U200.3@370,4390 373.46,4393.46 C201.2@373.46,4550
  Bottom Layer w15: U200.3@370,4390 1285,4390 v2(1310,4415) 1395,4415 1480,4330 1480,3463.25 1331.75,3315 645,3315 330,3000 330,975.99 600.99,705 1950,705 2160,495 2643.25,495 2710,428.25 P10.28@2710,310
10: cpu1.12 P10.2 | length 1691.4
  Top Layer w10: cpu1.12@930,1443.47 815.09,1443.47 783.57,1411.95 783.57,1025.43 934,875 1225,875 1410,690 P10.2@1410,310
11: cpu1.13 P10.4 | length 1690.6
  Top Layer w10: cpu1.13@930,1423.78 835.2,1423.78 810,1398.58 810,1040 940,910 1250,910 1510,650 P10.4@1510,310
12: cpu1.14 P10.6 | length 1675.6
  Top Layer w10: cpu1.14@930,1404.09 860.58,1404.09 832.77,1376.29 832.77,1067.23 965,935 1270,935 1610,595 P10.6@1610,310
13: cpu1.15 P10.8 | length 1661
  Top Layer w10: cpu1.15@930,1384.41 875.42,1384.41 855.58,1364.57 855.58,1099.42 990,965 1280,965 1710,535 P10.8@1710,310
14: cpu1.16 P10.10 | length 1649.1
  Top Layer w10: cpu1.16@930,1364.72 892.02,1364.72 877.35,1350.06 877.35,1132.65 1015,995 1295,995 1742.5,547.5 1742.5,417.5 1810,350 P10.10@1810,310
15: cpu1.17 P10.12 | length 1476.1
  Top Layer w10: cpu1.17@1020.55,1274.17 1021.24,1273.49 1021.24,1188.76 1105,1105 1350,1105 1910,545 P10.12@1910,310
16: cpu1.18 P10.14 | length 1509.4
  Top Layer w10: cpu1.18@1040.24,1274.17 1040.24,1209.76 1120,1130 1365,1130 2010,485 P10.14@2010,310
17: cpu1.19 P10.16 | length 1541.9
  Top Layer w10: cpu1.19@1059.92,1274.17 1059.92,1225 1134.92,1150 1378.6,1150 2110,418.6 P10.16@2110,310
20: cpu1.20
21: cpu1.21
22: cpu1.22
23: cpu1.23
24: cpu1.24
25: cpu1.25
26: cpu1.26
27: cpu1.27
30: cpu1.28
31: cpu1.29
32: cpu1.30
33: cpu1.31
34: cpu1.32
35: cpu1.33
36: cpu1.34
37: cpu1.35
40: cpu1.36
41: cpu1.37
42: cpu1.38
43: cpu1.39
44: cpu1.40
45: cpu1.41
46: cpu1.42
47: cpu1.43
50: cpu1.44
51: cpu1.45
52: cpu1.46
53: cpu1.47
54: cpu1.48
55: cpu1.49
56: cpu1.50
57: cpu1.51
60: cpu1.59 P10.11 | length 2132.7
  Top Layer w10: cpu1.59@1118.98,1750.55 1118.98,1431.18 980,1292.21 980,1190 1090,1080 1345,1080 1860,565 1860,260 P10.11@1910,210
61: cpu1.60 P10.9 | length 2165.3
  Top Layer w10: cpu1.60@1099.29,1750.55 1099.29,1442.42 945,1288.13 945,1170 1060,1055 1335,1055 1815,575 v1(1815,540)
  Bottom Layer w10: P10.9@1810,210 1860,260 1860,495 v1(1815,540)
62: cpu1.61 P10.7 | length 2154.2
  Top Layer w10: cpu1.61@1079.61,1750.55 1079.61,1452.63 910,1283.02 910,1160 1045,1025 1315,1025 1775,565 v1(1775,490)
  Bottom Layer w10: P10.7@1710,210 1760,260 1760,475 v1(1775,490)
63: cpu1.2 P10.5 | length 2415.5
  Top Layer w10: cpu1.2@930,1640.32 795.32,1640.32 710,1555 710,985 895,800 1180,800 1300,680 1300,170 1345,125 1525,125 P10.5@1610,210
64: cpu1.3 P10.3 | length 2232.6
  Top Layer w10: cpu1.3@930,1620.63 810.63,1620.63 735,1545 735,1005 915,825 1195,825 1327,693 1327,180 1357,150 1470,150 1510,190 P10.3@1510,210
65: cpu1.4 P10.1 | length 1973.1
  Top Layer w10: cpu1.4@930,1600.95 825.95,1600.95 760,1535 760,1015 925,850 1205,850 1355,700 1355,235 1380,210 P10.1@1410,210
A+3.3V: C12.2 C13.2 cpu1.64 R3.1 | length 954.7
  Top Layer w25: C13.2@920.12,1958.35 C12.2@920.12,1865 995,1790.12 995,1755
  Bottom Layer w25: v2(920,1870) 920,2195.21 1129.16,2404.37 v2(1228.46,2404.37)
D+3.3V: C7.2 C8.2 C9.2 C10.2 cpu1.1 DS1.2 R1.2 R4.1 | length 2231.2
  Top Layer w25: DS1.2@495,1692.6 R1.2@591.06,1692.6 ; R1.2@595,1696.54 595,1660 630,1625 715,1625 790,1700 v2(930,1700)
  Bottom Layer w25: v2(930,1700) 970,1700 1035,1635 C7.2@1044.17,1635 ; C9.2@1044.17,1532.64 C7.2@1044.17,1635 ; v2(1333.46,2404.37) 1546.82,2404.37 1610,2341.19 1610,1945 1546.54,1881.54 C8.2@1235,1881.54 1208.35,1854.88 C10.2@1125,1854.88 1075,1804.88 1075,1665.83 C7.2@1044.17,1635
DGND: C4.1 C5.1 C6.1 C7.1 C8.1 C9.1 C10.1 cpu1.63 P2.2 R5.1 | length 3879.4
  Top Layer w10: C4.1@685,1696.54 735,1696.54 765,1726.54 765,1790 725,1830 725,2010 760,2045 v2(760,2095) ; v2(1010,1875) 1040.24,1844.76 cpu1.63@1040.24,1750.55
  Top Layer w20: R5.1@1080,2379.37 v2(1080,2435) ; R5.1@1084.37,2375 1084.37,2330.63 1180,2235 1320,2235 1388.46,2166.54 v2(1388.46,2145) C6.1@1481.54,2145
  Bottom Layer w20: C10.1@1125,1965.12 1218.35,1965.12 C8.1@1235,1948.46 1235,2020 1290,2075 1318.46,2075 v2(1388.46,2145)
  Bottom Layer w30: P2.2@490,2100 v2@760,2100 ; v2(1010,1875) 985,1875 970,1860 970,1815 935,1780 760,1780 ; v2(1080,2435) 1040,2475 828.18,2475 760,2406.82 v2@760,2100 ; C7.1@1154.41,1635 1154.41,1575.94 C9.1@1108.46,1530 1108.46,1493.46 1090,1475 980,1475 760,1695 760,1780 ; 760,1780 v2(760,2095) v2@760,2100
GND: C200.1 C201.1 DC-DC1.1 DC-DC2.1 DC-DC3.2 P1.2 P11.3 P12.2 P_C1.2 P_C4.2 P_C7.2 R212.1 TVS1.2 TVS2.2 TVS3.2 TVS4.2 TVS5.2 TVS6.2 TVS7.2 U200.2 U201.11 U201.12 U201.13 U201.14 | length 13793.5
  Top Layer w40: P12.2@150,3509.09 253.34,3405.75 253.34,3121.26 167.73,3035.64 167.73,960.09 441.81,686 P11.3@441.81,480 ; P_C7.2@245,4095 270,4120 U200.2@270,4368.95 ; C201.1@306.54,4550 C200.1@238.46,4550 238.46,4462.26 270,4430.73 U200.2@270,4390 U200.2@270,4368.95 ; TVS2.2@804.96,4242.16 TVS1.2@804.96,4104.43 ; U201.12@1383.86,4467.2 1484.28,4467.2 1520.45,4431.04 1520.45,3966.3 1429.15,3875 1120,3875 1120,3956.75 1087.28,3989.48 842.86,3989.48 804.96,4027.37 TVS1.2@804.96,4104.43 ; U201.13@1383.86,4492.8 1795,4492.8 TVS4.2@1938.99,4636.78 1941.79,4639.58 TVS3.2@1941.79,4809.77 1941.79,4637.71 2313.89,4265.61 DC-DC1.1@2313.89,4015 ; TVS5.2@2288,3090 2125,3090 P_C1.2@2080,3135 2080,3943.52 2151.48,4015 DC-DC1.1@2313.89,4015 ; DC-DC1.1@2335,4015 DC-DC1.1@2313.89,4015 ; TVS6.2@4403,3150 4358,3105 P_C4.2@4200,3105 4200,3907.48 4307.52,4015 DC-DC2.1@4500,4015 ; U200.2@270,4368.95 319.11,4319.84 463.31,4319.84 R212.1@545,4401.54 545,4357.17 660,4242.17 P1.2@660,4175 730.57,4104.43 TVS1.2@804.96,4104.43
  Bottom Layer w40: TVS7.2@68.2,4253.63 114.04,4253.63 245,4122.68 P_C7.2@245,4095 245,4044.27 55.86,3855.13 55.86,3603.23 P12.2@150,3509.09 ; DC-DC1.1@2335,4015 DC-DC2.1@4500,4015
GNDA1: C4_singleCH1.1 C5_singleCH1.2 C6_singleCH1.1 C7_singleCH1.1 C8_singleCH1.1 C9_singleCH1.1 C13_singleCH1.1 C14_singleCH1.2 C15_singleCH1.1 C17_singleCH1.1 C18_singleCH1.2 CT1_singleCH1.1 CT2_singleCH1.2 DC-DC1.4 DCP1_singleCH1.5 GNDA1_singleCH1.1 GNDA1_singleCH1.2 ISO124_singleCH1.8 P4.2 P33.3 P_C2.2 P_C3.1 R1_singleCH1.2 R2_singleCH1.1 R6_singleCH1.1 TVS9.2 TVS10.1 TVS15_singleCH1.1 | length 10498.6
  Top Layer w10: R2_singleCH1.1@4115,941.54 R2_singleCH1.1@4116.54,943.07
  Top Layer w40: P4.2@3130,2785 3130,2869.11 3035,2964.11 P_C2.2@3035,3070 ; DC-DC1.4@3135,3915 3265,3785 3265,3425 3035,3195 P_C2.2@3035,3070 ; P_C3.1@3240,3070 P_C2.2@3035,3070 ; ISO124_singleCH1.8@3275,1073.07 3473.46,1271.54 3588.46,1271.54 v3(3615,1245) ; v3(3560.88,1018.6) 3587.28,1045 v3(3725,1045) 3725,1013.13 3772.11,966.02 3879.44,966.02 3903.93,941.54 C5_singleCH1.2@3975,941.54 ; v3(3919.77,861.37) 3941.37,861.37 3975,894.99 C5_singleCH1.2@3975,941.54 ; R2_singleCH1.1@4115,941.54 C5_singleCH1.2@3975,941.54 ; v4(4350.62,1515.76) 4303.43,1468.57 4201.94,1468.57 4105.65,1468.57 4038.91,1401.83 4038.91,1247.84 TVS15_singleCH1.1@4077.83,1208.92 4052.47,1183.55 4052.47,1007.14 R2_singleCH1.1@4116.54,943.07 4116.54,905.81 4215.14,807.21 4215.14,642.6 4214.5,641.96 4214.5,610.5 GNDA1_singleCH1.2@4275,550 GNDA1_singleCH1.1@4375,550
  Bottom Layer w10: C13_singleCH1.1@3692.22,1447.22 C13_singleCH1.1@3692.22,1455 ; C9_singleCH1.1@3797.22,1045 C9_singleCH1.1@3802.22,1050
  Bottom Layer w30: 3590.75,1048.46 C7_singleCH1.1@3615,1048.46
  Bottom Layer w40: DCP1_singleCH1.5@2823.53,907.88 2839.34,907.88 2898.87,848.35 3265.48,848.35 3325.01,907.88 3450.17,907.88 v3@3557.33,1015.05 ; P_C2.2@3035,3070 3092.1,3127.1 TVS9.2@3092.1,3198.51 ; C15_singleCH1.1@3039.51,1222.55 CT1_singleCH1.1@3149.54,1222.55 CT2_singleCH1.2@3262.2,1222.55 C14_singleCH1.2@3361.76,1222.55 ; TVS10.1@3231.38,3197.69 3231.38,3078.62 P_C3.1@3240,3070 3240,2926.61 3359.49,2807.12 4372.97,2807.12 4466.58,2713.52 4466.58,1631.72 v4(4350.62,1515.76) ; C14_singleCH1.2@3369.62,1230.4 3369.62,1080.95 3435.52,1015.05 v3@3557.33,1015.05 ; 3590.75,1048.46 v3(3560.88,1018.6) v3@3557.33,1015.05 ; C7_singleCH1.1@3615,1048.46 v3(3615,1245) 3615,1370 C13_singleCH1.1@3692.22,1447.22 ; v3(3725,1045) C9_singleCH1.1@3797.22,1045 ; C6_singleCH1.1@3807.78,790 3895.85,790 3919.77,813.92 v3(3919.77,861.37) ; GNDA1_singleCH1.1@4375,550 4375,374.23 4473.64,275.59 4877.19,275.59 4945.99,344.38 4945.99,635.37
GNDA1_C: P10.20
GNDA2: C4_singleCH2.1 C5_singleCH2.2 C6_singleCH2.1 C7_singleCH2.1 C8_singleCH2.1 C9_singleCH2.1 C13_singleCH2.1 C14_singleCH2.2 C15_singleCH2.1 C17_singleCH2.1 C18_singleCH2.2 CT1_singleCH2.1 CT2_singleCH2.2 DC-DC2.4 DCP1_singleCH2.5 GNDA1_singleCH2.1 GNDA1_singleCH2.2 ISO124_singleCH2.8 P5.2 P34.3 P_C5.2 P_C6.1 R1_singleCH2.2 R2_singleCH2.1 R6_singleCH2.1 TVS15_singleCH2.1 | length 8549.5
  Top Layer w10: R2_singleCH2.1@4103.37,2126.84 R2_singleCH2.1@4116.54,2140
  Top Layer w20: v1(3560,2216.93) 3585,2241.93 v1(3725,2241.93) 3804.38,2162.55 3862.13,2162.55 3897.85,2126.84 R2_singleCH2.1@4103.37,2126.84 ; R2_singleCH2.1@4116.54,2140 4116.54,2120.39 4205,2031.93 4205,1816.93 GNDA1_singleCH2.2@4275,1746.93
  Top Layer w40: R6_singleCH2.1@3529.43,2467.52 v8@3610.35,2467.52 ; TVS15_singleCH2.1@4239.4,2439 4384.05,2439 v3(4406.29,2416.76) ; GNDA1_singleCH2.2@4275,1746.93 GNDA1_singleCH2.1@4375,1746.93 4501.97,1619.96 v3(4902.86,1619.96) ; P_C5.2@5235,3080 P_C6.1@5445,3080 ; DC-DC2.4@5300,3915 5300,3781.68 5444.77,3636.92 5444.77,3080.23 P_C6.1@5445,3080 ; P5.2@5375,2895 5375,2944.15 5445,3014.15 P_C6.1@5445,3080 ; R1_singleCH2.2@6098.3,3186.37 R1_singleCH2.2@6096.01,3186.37 ; R1_singleCH2.2@6100.56,3194.23 R1_singleCH2.2@6102.21,3192.58 R1_singleCH2.2@6096.01,3186.37 ; P34.3@6156.29,2179.86 6098.68,2179.86 5990.75,2287.78 5990.75,3081.12 R1_singleCH2.2@6096.01,3186.37 ; P_C6.1@5445,3080 5551.37,3186.37 R1_singleCH2.2@6096.01,3186.37
  Bottom Layer w10: v1(3560,2216.93) 3588.46,2245.39 ; C9_singleCH2.1@3797.22,2241.93 C9_singleCH2.1@3802.22,2246.93
  Bottom Layer w20: v1(3725,2241.93) C9_singleCH2.1@3797.22,2241.93
  Bottom Layer w40: DCP1_singleCH2.5@2828.48,2102.22 2844.3,2102.22 2905.71,2040.81 3268.55,2040.81 3288.01,2060.27 3288.01,2065.25 3394.69,2171.93 ; C15_singleCH2.1@3049.36,2413.16 3132.16,2413.16 CT1_singleCH2.1@3132.76,2412.57 3152.65,2392.67 CT2_singleCH2.2@3268.74,2392.67 ; C14_singleCH2.2@3377.65,2389.26 3374.24,2392.67 CT2_singleCH2.2@3268.74,2392.67 ; C13_singleCH2.1@3692.22,2651.93 3644.88,2651.93 3615,2622.05 C7_singleCH2.1@3615,2245.39 3588.46,2245.39 3582.1,2245.39 3508.64,2171.93 3394.69,2171.93 ; C5_singleCH2.2@3754.72,2423.97 3754.72,2294.43 C9_singleCH2.1@3802.22,2246.93 ; C6_singleCH2.1@3807.78,1986.93 3876.83,1986.93 3910.52,2020.62 v1(3910.52,2118.1) ; GNDA1_singleCH2.1@4375,1746.93 4406.29,1778.22 v3(4406.29,2416.76) ; v3(5370.81,2746.28) 5375,2750.47 P5.2@5375,2895 ; CT2_singleCH2.2@3268.74,2392.67 3268.74,2276.26 ISO124_singleCH2.8@3275,2270 3373.07,2171.93 3394.69,2171.93
  other v8: 3613.73,2464.14
GNDA2_C: P10.24